# Altium PCB FotoKiteAdapter.PcbDoc
Units mil, origin at the board's own origin, x right, y up, seen from the top; angles counter-clockwise.
Board outline 2755.29 x 2755.91 mil, 4 copper layers (Top Layer, InternalPlane1, Mid-Layer 2, Bottom Layer); 97 components, 46 nets, 297 pads, 92 vias.
Unrouted connection lines stored in the file: 100.
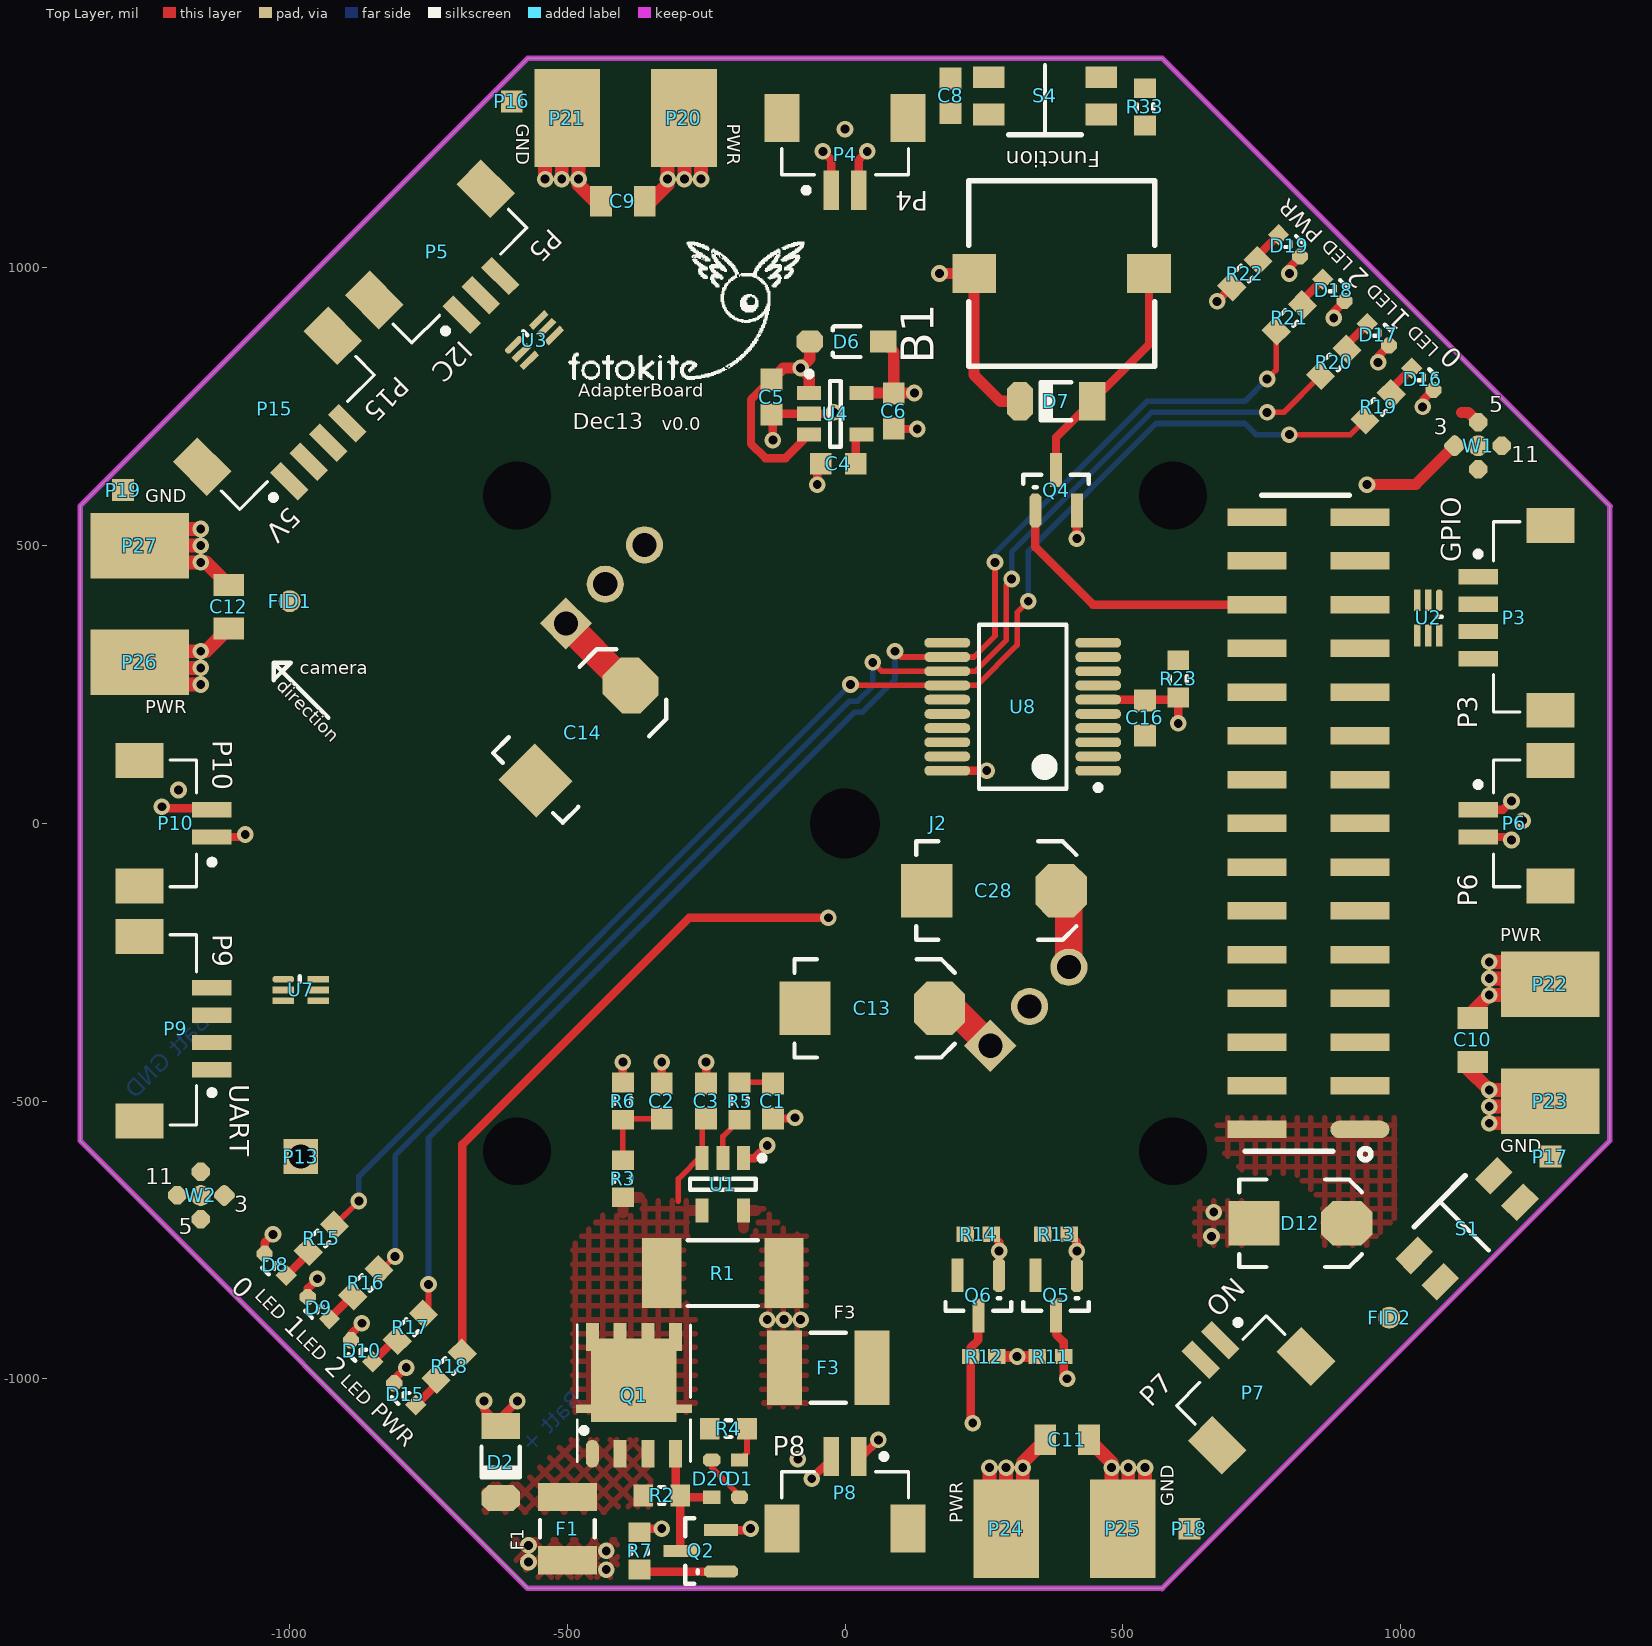
[diagram p0: Top Layer view]
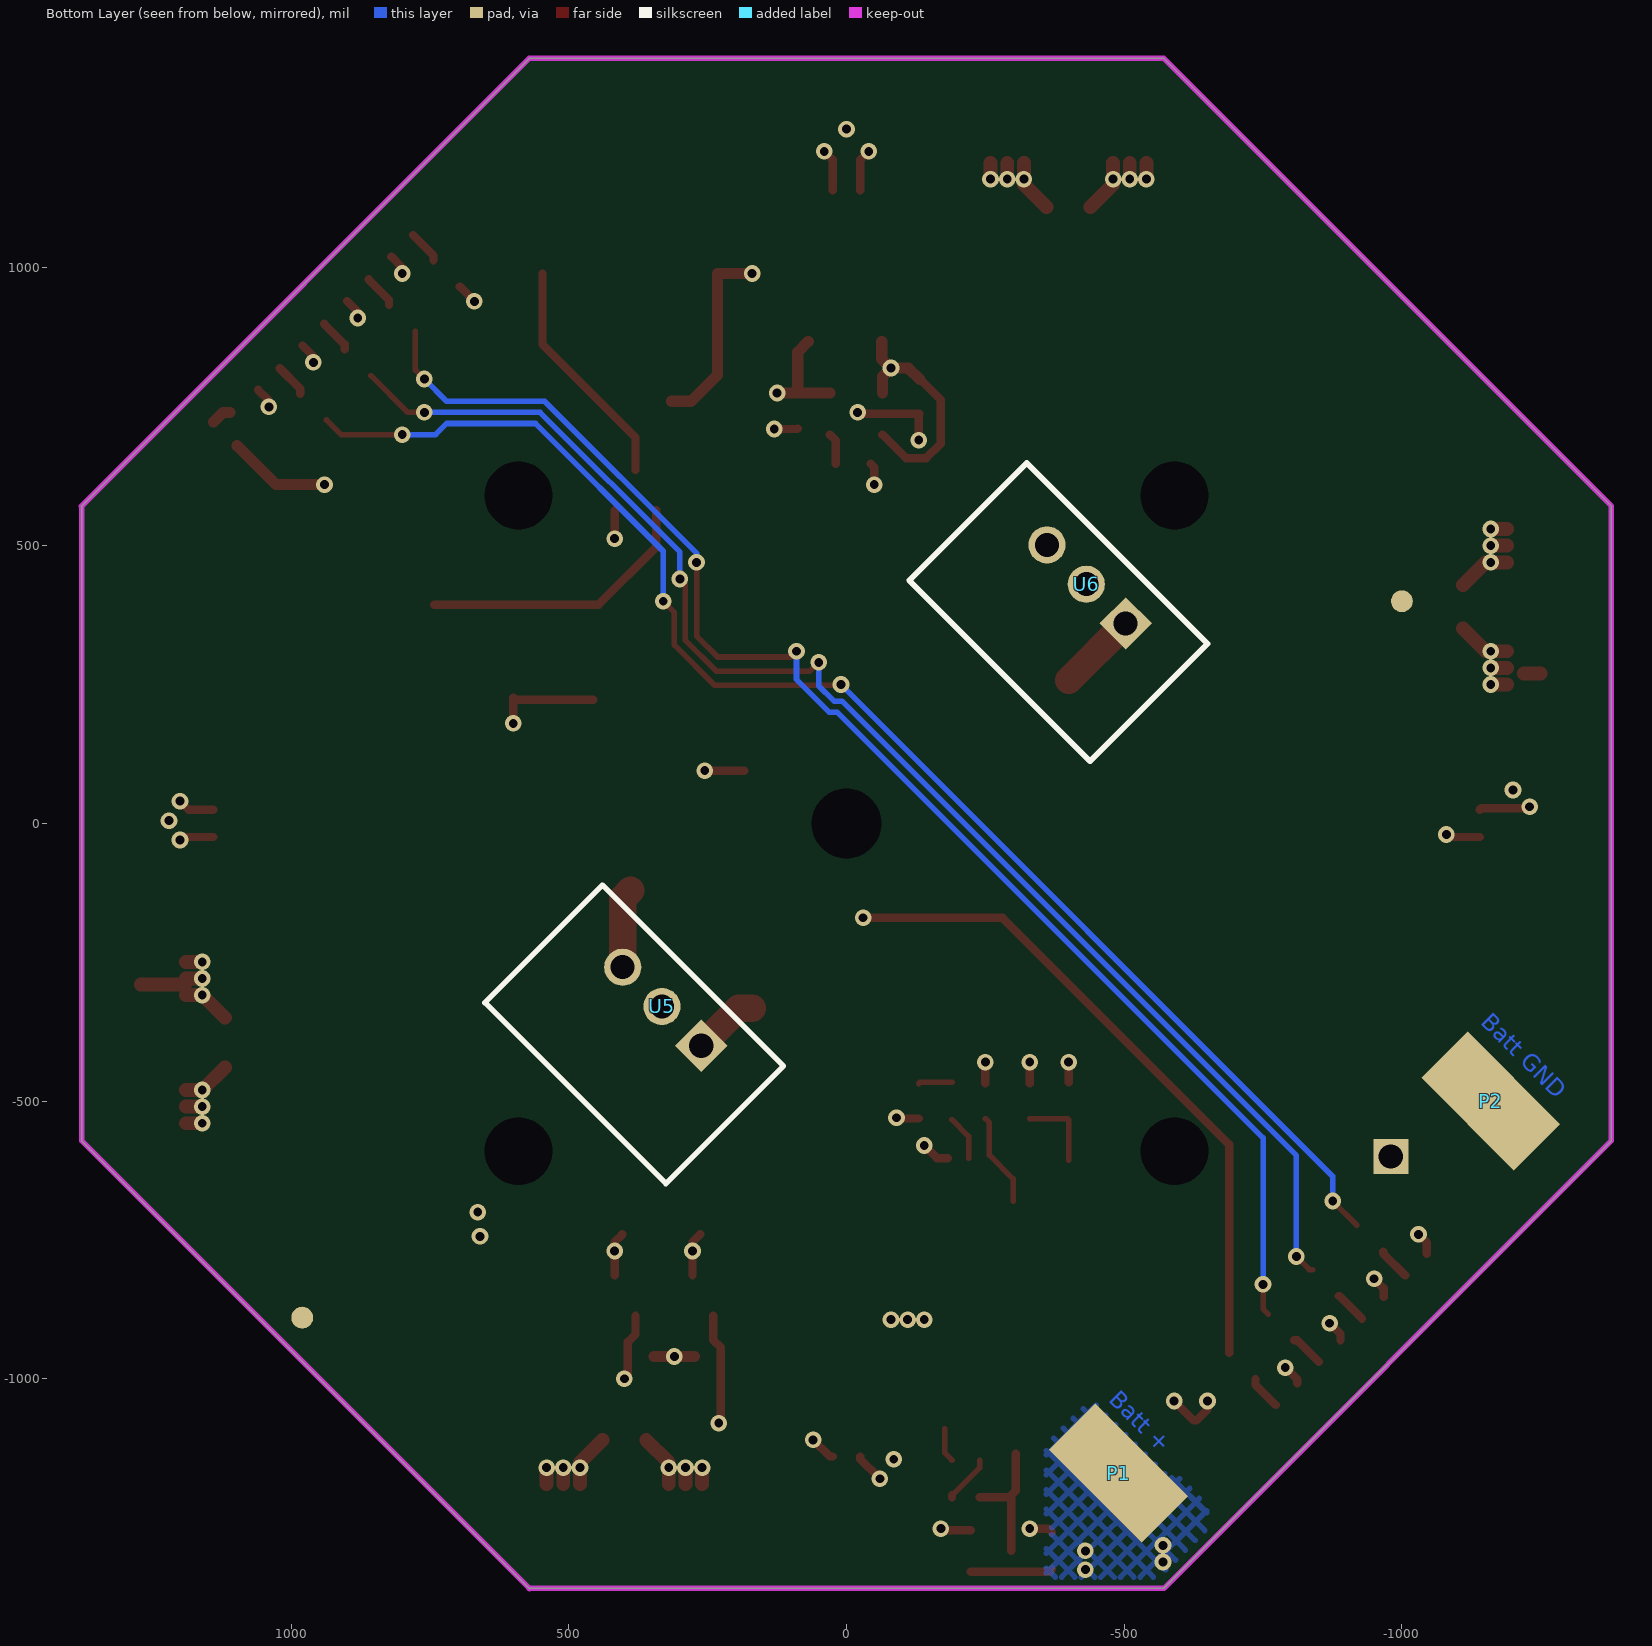
[diagram p1: Bottom Layer view, seen from below]
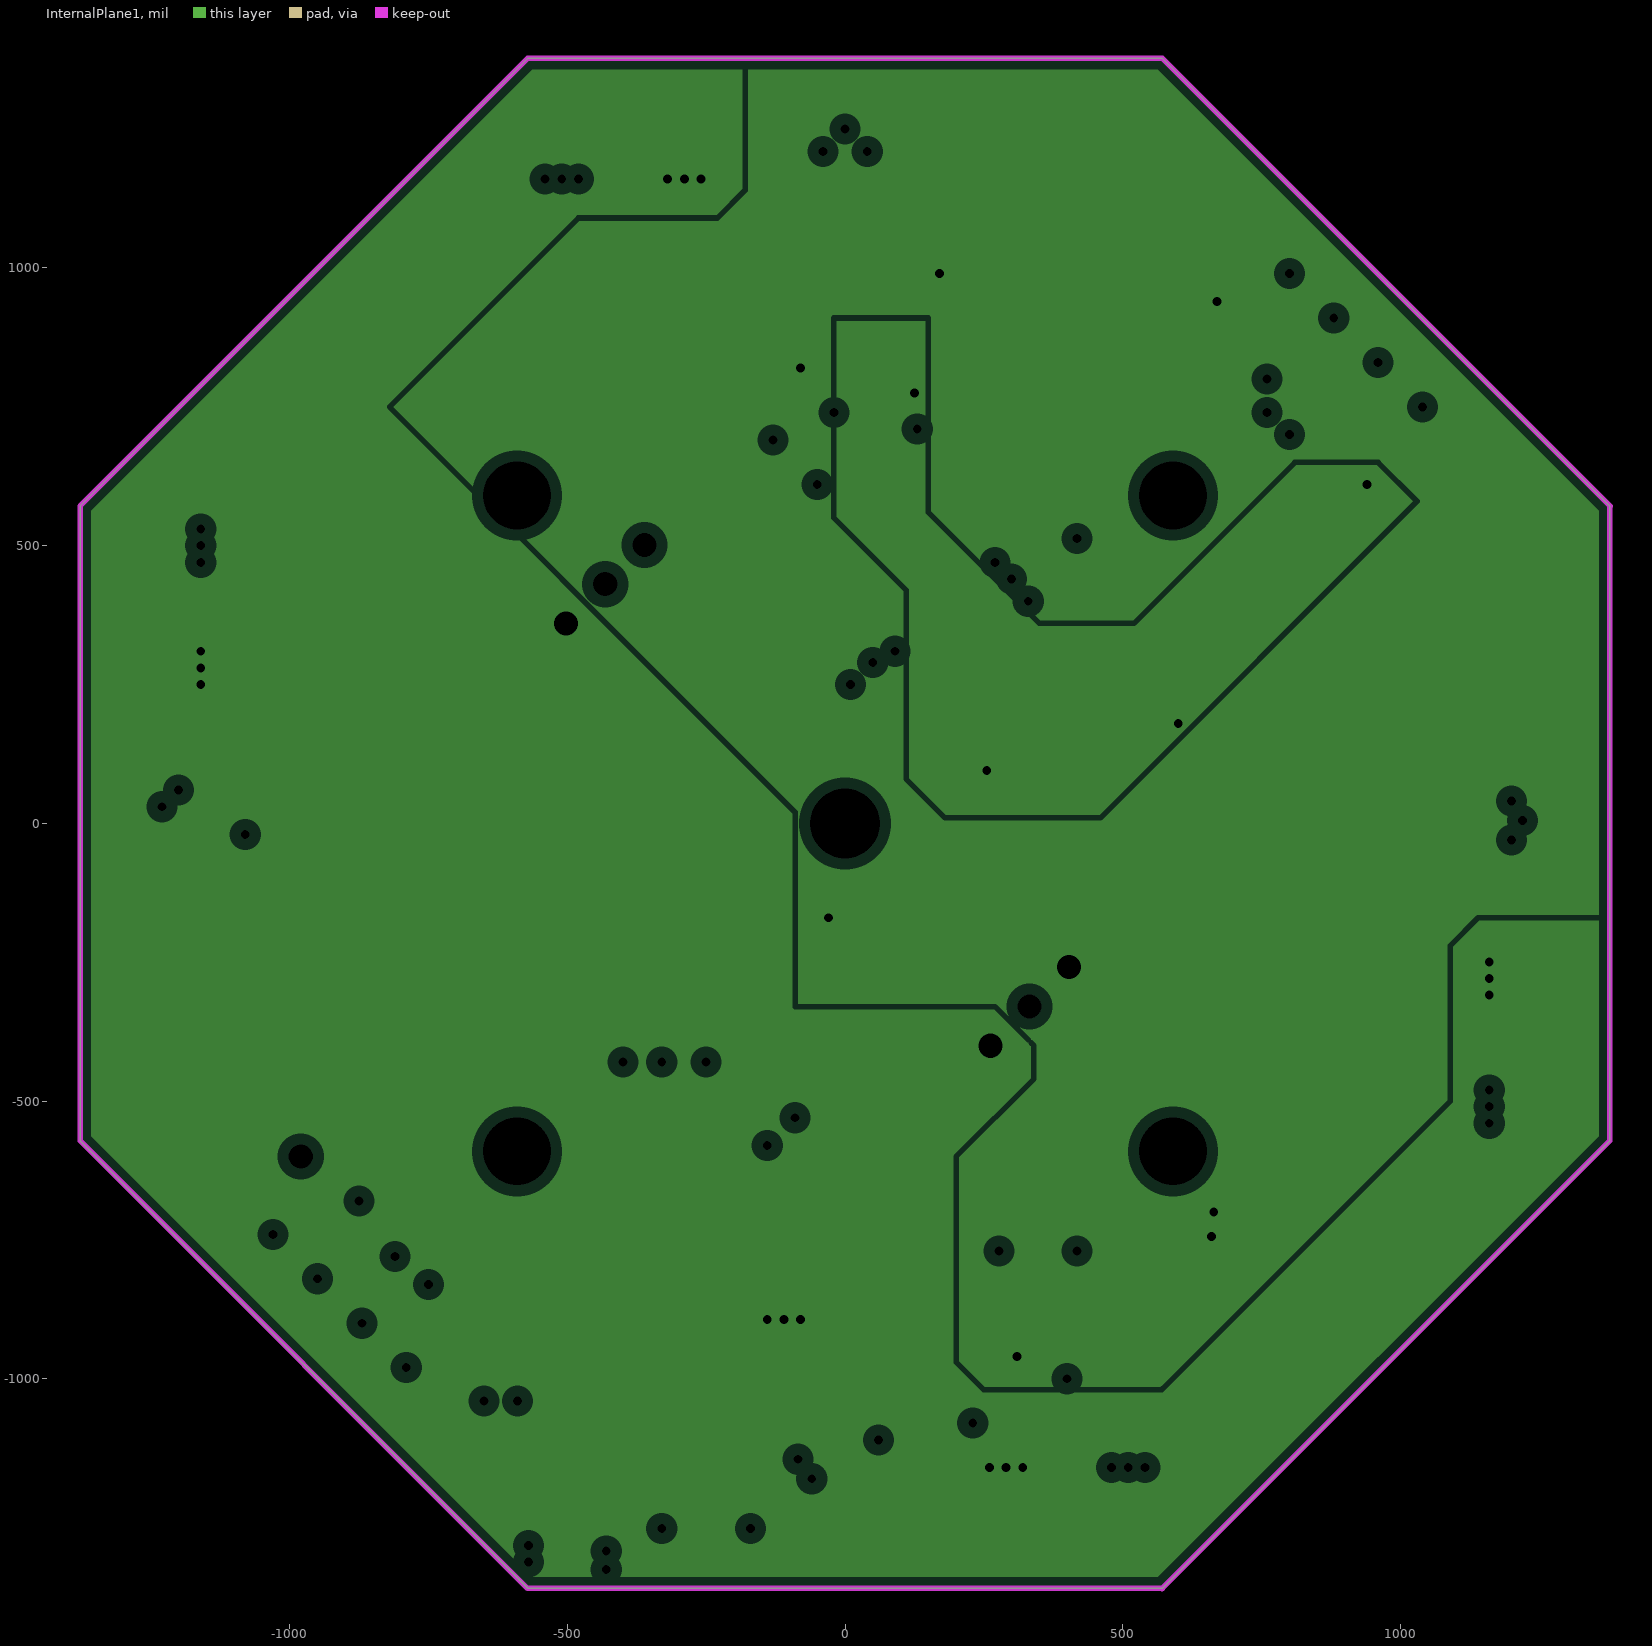
[diagram p2: InternalPlane1, clearances drawn from the general rule]
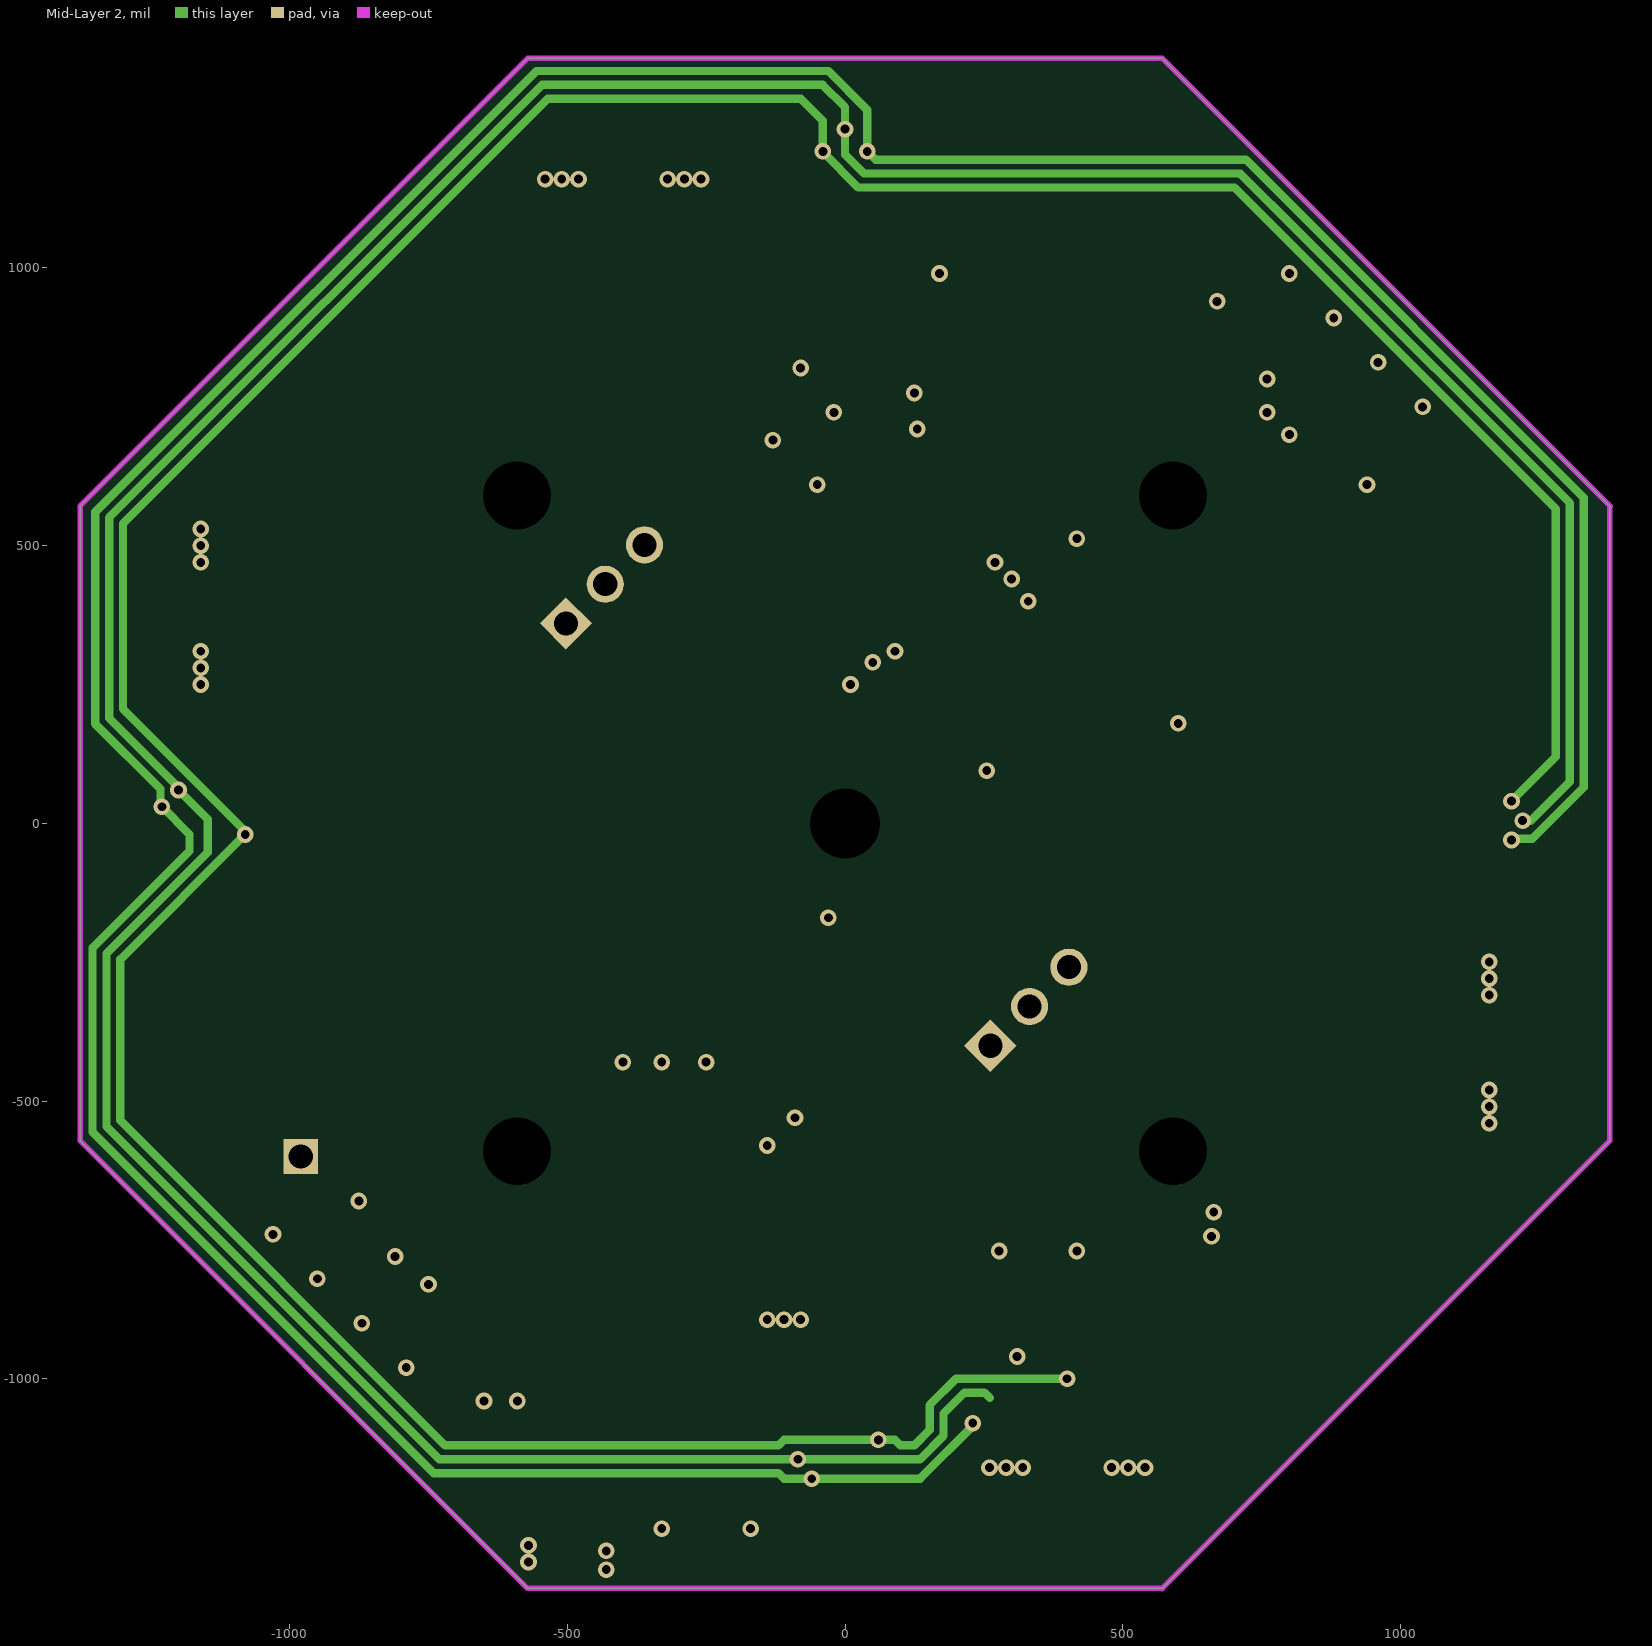
[diagram p3: Mid-Layer 2]

## Layer stack, top to bottom
Top Layer: signal copper 1.4
Dielectric: core 12.6, FR-4, Dk 4.8
InternalPlane1: plane copper 1.4, net D5V
Dielectric: prepreg 12.6, FR-4, Dk 4.8
Mid-Layer 2: signal copper 1.4
Dielectric: core 12.6, FR-4, Dk 4.8
Bottom Layer: signal copper 1.4

## Board outline
-1377.34,-571.38 -1377.34,571.38 -570.77,1377.95 -571.38,1377.34 571.38,1377.34 1377.95,570.77 1377.34,571.38 1377.34,-571.38 570.77,-1377.95 571.38,-1377.34 -571.38,-1377.34

## Design rules (kind name [scope] priority, off if disabled: settings)
Clearance "fine pitch clearance" [HasFootprint('SSOP16') OR   HasFootprint('DF17(3.0)-20DS-0.5V(57)-RECEPTABLE') OR HasFootprint('SOT-666-N') OR HasFootprint('LQFP100 50P1600X1600X160-N') OR HasFootprint('SSOP-SS20_N')  OR HasFootprint('TSSOP10_L') and not InNetClass('POWER')] p1: gap=5
Clearance "std clearance" [All] p2: gap=10 // normal signals
FabricationTestPointUsage TestPointUsage [All] p1: valid=0 allowmultiple=FALSE
FabricationTestpoint Testpoint [All] p1: side=3 testpointundercomponent=TRUE minsize=40 maxsize=100 preferedsize=60 minholesize=0 maxholesize=40 preferedholesize=32 testpointgrid=1 allowsidetop=TRUE allowsidebottom=TRUE usegrid=TRUE gridtolerance=0.01
HoleSize [All] p1: absolutevalues=TRUE maxlimit=393.7 minlimit=11.81 maxpercent=80.000 minpercent=20.000
MinimumSolderMaskSliver [All] p1: minsoldermaskwidth=1.8
PlaneClearance [All] p1: clearance=20
PlaneConnect [All] p1: planeconnectstyle=Relief reliefexpansion=20 reliefentries=4 reliefconductorwidth=10 reliefairgap=10
PolygonConnect PolygonConnect_1 [InNetClass('POWER')AND isvia] p1: connectstyle=Direct reliefconductorwidth=10 reliefentries=4 polygonreliefangle="90 Angle" airgapwidth=10
PolygonConnect PolygonConnect_3 [InNetClass('POWER')and InPadClass('POWER')] p2: connectstyle=Direct reliefconductorwidth=20 reliefentries=4 polygonreliefangle="90 Angle" airgapwidth=10
PolygonConnect PolygonConnect_2 [InNetClass('POWER') and PadXSize_AllLayers > 15] p3: connectstyle=Relief reliefconductorwidth=20 reliefentries=4 polygonreliefangle="90 Angle" airgapwidth=10
PolygonConnect [All] p4: connectstyle=Relief reliefconductorwidth=10 reliefentries=4 polygonreliefangle="90 Angle" airgapwidth=10
RoutingTopology "power supply" [InNetClass('Power')] p1: topology=Starburst
RoutingTopology "std signal lines" [All] p2: topology=Shortest
RoutingVias [All] p1: holewidth=15.75 width=31.5 viastyle="Through Hole" minholewidth=15.75 minwidth=31.5 maxholewidth=15.75 maxwidth=31.5
SMDNeckDown finepitch [hasFootprint('TSSOP10_L')] p1: percent=120.000
SMDNeckDown [All] p2: percent=100.000
SilkToSilkClearance SilkToSilkClearance_1 [HasFootprint('3 axis racceleration')] p1: silktosilkclearance=0
SilkToSilkClearance [All] p2: silktosilkclearance=5
SilkToSolderMaskClearance SilkscreenOverComponentPads [IsPad] p1: minsilkscreentomaskgap=5 clearancetoexposedcopper=TRUE
SolderMaskExpansion [All] p1: expansion=4
Width "Schematic Width Constraint" [InNet('SWBATT')] p1: maxlimit=200 minlimit=10 preferedwidth=25 midlayer2_minwidth=180 midlayer2_maxwidth=180 midlayer2_prefwidth=10 minimp=50.000000 maximp=50.000000 favimp=50.000000
Width "pwr lines" [InNetClass('Power')] p2: maxlimit=100 minlimit=8 preferedwidth=15
Width "signal lines Width" [All] p3: maxlimit=25 minlimit=8 preferedwidth=10 // std lines for low current signals
19 further rules are at their usual default settings.

## Classes and differential pairs
component class Connector: C11 C12 FID1 FID2 P1 P2 P3 P4 P5 P6 P8 P9 P10 P16 P17 P18 P19 P20 P21 P22 P23 P24 P25 P26 P27 Q5 Q6 R11 R12 R13 R14 U2 U3 U7 W1 W2
component class Power: C1 C2 C3 C4 C5 C6 C13 C14 C28 D1 D2 D6 D20 F1 F3 P7 P13 P15 Q1 Q2 R1 R2 R3 R4 R5 R6 R7 S1 U1 U4 U5 U6
net class Power: BAT D3V3 D5V D11V2 DGND NetD2_2 NetD12_2 SWBATT V_BATT_SUPPLY
component class uC: B1 C8 C16 D7 D8 D9 D10 D12 D15 D16 D17 D18 D19 J2 Q4 R15 R16 R17 R18 R19 R20 R21 R22 R23 R33 S4 U8
pad class POWER: C28-1 D2-2 D12-1 D12-2 F1-1 F1-2 F3-1 F3-2 J2-1 J2-2 P1-1 P2-1 Q1-0 Q1-1 Q1-2 Q1-3 Q1-4 Q1-5 Q1-6 Q1-7 Q1-8 R1-1 R1-2 R2-2

## Components (designator, comment, footprint, x,y, rotation, side; value= is the part's Value field where it differs from the comment)
B1 "Buzzer" Buzzer_SMT-0827-SW-3V-R 390,990 r90 top
C1 "100nF" "CAP_0603i_1608m -N" -130,-500 r90 top
C2 "100nF" "CAP_0603i_1608m -N" -330,-500 r270 top
C3 "100nF" "CAP_0603i_1608m -N" -250,-500 r270 top
C4 "10nF" "CAP_0603i_1608m -N" -12.24,647.4 r0 top
C5 "2u2F" "CAP_0603i_1608m -N" -132.24,767.4 r90 top
C6 "2u2F" "CAP_0603i_1608m -N" 87.76,742.4 r90 top
C8 "100nF" "CAP_0603i_1608m -N" 190,1310 r270 top
C9 "10uF" "CAP_0805i_2012m -N" -400,1120 r0 top
C10 "10uF" "CAP_0805i_2012m -N" 1130,-390 r90 top
C11 "10uF" "CAP_0805i_2012m -N" 400,-1110 r180 top
C12 "10uF" "CAP_0805i_2012m -N" -1110,390 r270 top
C13 "22uF" "EIA-7343-31 case D -N" 49,-333 r180 top
C14 "22uF" "EIA-7343-31 case D -N" -472,163 r225 top
C16 "100nF" "CAP_0603i_1608m -N" 540,190 r270 top
C28 "100uF" "EIA-7343-31 case D -N" 268,-121 r180 top
D1 "CDSU4148" SOD523F -190,-1180 r90 top
D2 "SMA6J20A" "Mini MELF - SOD-80 -N" -620,-1150 r90 top
D6 "MBR0540T1G" SOD123 2.76,867.4 r0 top
D7 "Diode" "Mini MELF - SOD-80 -N" 380,760 r0 top
D8 "Diode LED green" LED_LTST_SIDE -1025.56,-794.44 r315 top (schematic designator D1)
D9 "Diode LED red" LED_LTST_SIDE -947.78,-872.22 r315 top (schematic designator D2)
D10 "Diode LED yellow" LED_LTST_SIDE -870,-950 r315 top (schematic designator D3)
D12 "B230" "Diode SMB DO-214aa -N" 820,-720 r180 top
D15 "Diode LED green" LED_LTST_SIDE -792.22,-1027.78 r315 top (schematic designator D4)
D16 "Diode LED green" LED_LTST_SIDE 1040,800 r135 top (schematic designator D7)
D17 "Diode LED red" LED_LTST_SIDE 960,880 r135 top (schematic designator D8)
D18 "Diode LED yellow" LED_LTST_SIDE 880,960 r135 top (schematic designator D9)
D19 "Diode LED green" LED_LTST_SIDE 800,1040 r135 top (schematic designator D10)
D20 "CDSU4148" SOD523F -240,-1180 r270 top
F1 "3413.0331.22" "Fuse_1210i_3225m -N" -500,-1270 r90 top (schematic designator F7)
F3 "1812L150/24MR" "Fuse_1812i_4532m -N" -30,-980 r0 top (schematic designator F2)
FID1 "Fiducial" "Fiducial 2 sides" -1000,400 r90 top
FID2 "Fiducial" "Fiducial 2 sides" 980,-890 r90 top
J2 "PX4FMU_v1.7_Expansion Con" PX4FMU_v1.7_module_sicket 1003.94,-708.66 r180 top locked
P1 "Batt+" Pad_3x6mm -490,-1170 r135 bottom
P2 "Batt-" Pad_3x6mm -1160,-500 r135 bottom
P3 "DF13-4Pin" Hirose_DF13_SMT_RA_N4 1270,370 r270 top
P4 "ESC1" Hirose_DF13_SMT_RA_N2 0,1270 r0 top
P5 "DF13-3Pin" Hirose_DF13_SMT_RA_N3 -730,1060 r45 top
P6 "ESC2" Hirose_DF13_SMT_RA_N2 1270,0 r270 top
P7 "DF13-2Pin" Hirose_DF13_SMT_RA_N2 750,-1040 r225 top
P8 "ESC3" Hirose_DF13_SMT_RA_N2 0,-1270 r180 top (schematic designator P4)
P9 "DF13-4Pin" Hirose_DF13_SMT_RA_N4 -1270,-370 r90 top (schematic designator P3)
P10 "ESC4" Hirose_DF13_SMT_RA_N2 -1270,0 r90 top (schematic designator P4)
P13 "GND" PIN1 -980,-570 r0 top
P15 "DF13-4Pin" Hirose_DF13_SMT_RA_N4 -1040,760 r45 top
P16 "I2C GND" Pad_0603 -600,1300 r90 top
P17 "I2C GND" Pad_0603 1270,-600 r90 top
P18 "I2C GND" Pad_0603 620,-1270 r90 top
P19 "I2C GND" Pad_0603 -1300,600 r90 top
P20 "Motor 1+" Pad_3x4.5mm -290,1270 r0 top
P21 "Motor 1-" Pad_3x4.5mm -500,1270 r0 top
P22 "Motor 2+" Pad_3x4.5mm 1270,-290 r90 top
P23 "Motor 2-" Pad_3x4.5mm 1270,-500 r90 top
P24 "Motor 3+" Pad_3x4.5mm 290,-1270 r180 top
P25 "Motor 3-" Pad_3x4.5mm 500,-1270 r180 top
P26 "Motor 4+" Pad_3x4.5mm -1270,290 r90 top
P27 "Motor 4-" Pad_3x4.5mm -1270,500 r90 top
Q1 "SI7635DP-T1-GE3" "PowerPak SO-8" -380,-1030 r90 top
Q2 "BSS138" SOT23-N -260,-1310 r180 top
Q4 "BSS138" SOT23-N 380,600 r90 top
Q5 "BSN20" SOT23-N 380,-850 r270 top
Q6 "BSN20" SOT23-N 240,-850 r270 top
R1 "1m" "RES_2512i_6332m -N" -220,-810 r0 top
R2 "100k" "RES_0603i_1608m -N" -330,-1210 r180 top
R3 "360k" "RES_0603i_1608m -N" -400,-640 r270 top
R4 "100" "RES_0603i_1608m -N" -210,-1090 r180 top
R5 "100k" "RES_0603i_1608m -N" -190,-500 r90 top
R6 "100k" "RES_0603i_1608m -N" -400,-500 r270 top
R7 "10k" "RES_0603i_1608m -N" -370,-1310 r270 top
R11 "Res" "RES_0402i_1005m -N" 370,-960 r180 top
R12 "Res" "RES_0402i_1005m -N" 250,-960 r0 top
R13 "Res" "RES_0402i_1005m -N" 380,-740 r0 top
R14 "Res" "RES_0402i_1005m -N" 240,-740 r0 top
R15 "2k7" "RES_0603i_1608m -N" -942.73,-747.27 r45 top (schematic designator R2)
R16 "1k2" "RES_0603i_1608m -N" -862.73,-827.27 r45 top (schematic designator R3)
R17 "680R" "RES_0603i_1608m -N" -782.73,-907.27 r45 top (schematic designator R4)
R18 "1k" "RES_0603i_1608m -N" -712.73,-977.27 r45 top (schematic designator R5)
R19 "2k7" "RES_0603i_1608m -N" 960,750 r225 top (schematic designator R6)
R20 "1k2" "RES_0603i_1608m -N" 880,830 r225 top (schematic designator R7)
R21 "680R" "RES_0603i_1608m -N" 800,910 r225 top (schematic designator R8)
R22 "1k" "RES_0603i_1608m -N" 720,990 r225 top (schematic designator R9)
R23 "10k" "RES_0603i_1608m -N" 600,260 r270 top
R33 "10k" "RES_0603i_1608m -N" 540,1290 r270 top
S1 "EVQ-PUB02K" EVQPU 1120,-730 r45 top
S4 "EVQ-PUB02K" EVQPU 360,1310 r180 top
U1 "MAX4372FEUK+T" MAXM-U5+1_N -220,-650 r270 top
U2 "PESD3V3L5UV" SOT-666-N 1050,370 r270 top (schematic designator U?)
U3 "PESD3V3L5UV" SOT-666-N -560,870 r45 top
U4 "LP2985IM5X-3.3" MF05A_N -17.24,737.4 r0 top
U5 "TSR-1-2450" TST-1 403,-259 r225 bottom locked
U6 "TSR-1-2450" TST-1 -361.06,501.34 r225 bottom locked (schematic designator U5)
U7 "PESD3V3L5UV" SOT-666-N -980,-300 r0 top (schematic designator U2)
U8 "MCP23008-E/SS" SSOP-SS20_N 320,210 r180 top
W1 "Jumper 5pin" "J5_solder xstyle" 1140,680 r45 top
W2 "Jumper 5pin" "J5_solder xstyle" -1160,-670 r225 top (schematic designator W1)

## Footprints (in the part's own frame and the unit in brackets; to place one, negate y for a bottom-side part, rotate by r counter-clockwise, add the part's x,y. Pads: shape width x height; smd on the part's side, far side on the other; paste and mask are expansions set on the pad)
Buzzer_SMT-0827-SW-3V-R [mm]
  rect 1.8x2 smd: 1(0,4) 2(0,-4)
  silkscreen extent -4.25,-4.25 4.25,4.25, body extent -4.32,-4.32 4.32,4.32, height 5
"CAP_0603i_1608m -N" [mm] "Chip Capacitor, Body 1.6x0.8mm, IPC Medium Density"
  rect 1x1 smd: 1(-0.8,0) 2(0.8,0)
  body extent -0.8,-0.4 0.8,0.4, height 0.8
"CAP_0805i_2012m -N" [mm] "Chip Capacitor, Body 2.0x1.3mm, IPC Medium Density"
  rect 1x1.4 smd: 1(-1,0) 2(1,0)
  body extent -1,-0.62 1,0.63, height 0.6
"Diode SMB DO-214aa -N" [mm] "Diode Case  4.4x3.5mm, IPC Medium Density"
  rect 2.35x2.05 smd: 1(2.125,0)
  oct 2.35x2.05 smd: 2(-2.125,0)
  silkscreen extent -2.8,-2 2.8,2, body extent -2.7,-1.8 2.7,1.8, height 2.5
"EIA-7343-31 case D -N" [mm] "Molded Diode, 2-Leads, Body 7.3x4.3mm, IPC Medium Density"
  oct 2.35x2.45 smd: 1(-3.075,0)
  rect 2.35x2.45 smd: 2(3.075,0)
  silkscreen extent -3.77,-2.25 3.56,2.25, body extent -4.5,-2.32 4.5,2.29
EVQPU [mm] "Panasonic SMT Tact Switch"
  rect 1.45x1 smd: 1(-2.575,0.85) 1(2.575,0.85) 2(-2.575,-0.85) 2(2.575,-0.85)
  silkscreen extent -1.65,-1.4 1.65,1.78, body extent -2.35,-2.66 2.35,1.71, height 1.65
"Fiducial 2 sides" [mm] "Fiducial marks"
  round 1 smd mask+0.5: 0(0,0)
  round 1 smd far side mask+0.5: 0(0,0)
"Fuse_1210i_3225m -N" [mm] "Chip Fuse Body 3.2x2.5mm, IPC Medium Density"
  rect 1.3x2.7 smd: 1(-1.45,0) 2(1.45,0)
  silkscreen extent -0.4,-1.25 0.4,1.25, body extent -1.61,-1.29 1.61,1.29, height 0.67
"Fuse_1812i_4532m -N" [mm] "Chip Fuse Body 4.5x3.2mm, IPC Medium Density"
  rect 1.6x3.4 smd: 1(-2,0) 2(2,0)
  silkscreen extent -0.8,-1.6 0.8,1.6, body extent -2.36,-1.7 2.37,1.71, height 1.34
Hirose_DF13_SMT_RA_N2 [mm] "Hirose DF13-series SMT right-angle connector, 2 pin"
  rect 0.7x1.8 smd: 1(-0.625,-3.3) 2(0.625,-3.3)
  rect 1.6x2.2 smd: ""(-2.875,0) ""(2.875,0)
  silkscreen extent -2.9,-3.43 2.9,-1.4, body extent -2.08,-2.4 2.07,2.5, height 3.6
Hirose_DF13_SMT_RA_N3 [mm] "Hirose DF13-series SMT right-angle connector, 3 pin"
  rect 0.7x1.8 smd: 1(-1.875,-3.3) 2(-0.625,-3.3) 3(0.625,-3.3)
  rect 1.6x2.2 smd: ""(-4.225,0) ""(2.975,0)
  silkscreen extent -4.4,-3.43 3.05,-1.4, body extent -4.38,-2.6 3,2.3, height 3.6
Hirose_DF13_SMT_RA_N4 [mm] "Hirose DF13-series SMT right-angle connector, 4 pin"
  rect 0.7x1.8 smd: 1(-1.875,-3.3) 2(-0.625,-3.3) 3(0.625,-3.3) 4(1.875,-3.3)
  rect 1.6x2.2 smd: ""(-4.225,0) ""(4.225,0)
  silkscreen extent -4.4,-3.43 4.3,-1.4, body extent -4.38,-2.6 4.3,2.3, height 3.6
"J5_solder xstyle" [mm]
  rrect50% 0.8x0.8 smd: 1(-0.762,0.762)
  oct 0.8x0.8 smd: 2(-0.762,-0.762) 3(0.762,-0.762) 4(0.762,0.762)
  round 0.95 smd: 5(0,0)
  body extent -0.91,-0.15 0.15,0.91, height 0.3
LED_LTST_SIDE [mm]
  rect 0.7x0.7 smd: 1(0.7,0)
  oct 0.7x0.7 smd: 2(-0.7,0)
  silkscreen extent -0.33,-0.53 0.1,0.18, body extent -0.74,-0.81 0.85,0.34, height 0.6
MAXM-U5+1_N [mm] "SOT23, 5-Leads, Body 2.9x1.625mm, Pitch 0.95mm, IPC Medium Density"
  rect 1.1x0.6 smd: 1(-1.2,0.95) 2(-1.2,0) 3(-1.2,-0.95) 4(1.2,-0.95) 5(1.2,0.95)
  silkscreen extent -1.32,-1.5 0.25,1.93, body extent -0.87,-1.5 0.87,1.5, height 1.45
MF05A_N [mm] "SOT23, 5-Leads, Body 2.9x1.6mm, Pitch 0.95mm, Lead Span 2.8mm, IPC Medium Density"
  rect 1.1x0.65 smd: 1(-1.2,0.95) 2(-1.2,0) 3(-1.2,-0.95) 4(1.2,-0.95) 5(1.2,0.95)
  silkscreen extent -1.32,-1.5 0.25,1.95, body extent -0.83,-1.49 0.83,1.5, height 1.19
"Mini MELF - SOD-80 -N" [mm] "MELF Diode, 2-Leads, Body 3.5x1.5mm, IPC Medium Density"
  rect 1.2x1.75 smd: 1(1.65,0)
  oct 1.2x1.75 smd: 2(-1.65,0)
  silkscreen extent -0.7,-0.88 0.7,0.87, body extent -1.75,-0.75 1.75,0.75, height 1.55
Pad_3x4.5mm [mm]
  rect 3x4.5 smd: 1(0,0)
Pad_3x6mm [mm]
  rect 3x6 smd: 1(0,0)
Pad_0603 [mm]
  rect 1x1 smd: 1(0,0)
PIN1 [mm] "Connector; Plug"
  rect 1.6x1.6 hole 1.1: 1(0,-0.762)
"PowerPak SO-8" [mm] "for    SI7635DP-T1-GE3"
  rect 0.4x5.3 smd: 0(-0.61,0)
  rect 3.81x3.91 smd: 0(0.69,0)
  oval 1.27x0.6 smd: 1(-2.67,1.905)
  rect 1.27x0.6 smd: 2(-2.67,0.635) 3(-2.67,-0.635) 4(-2.67,-1.905) 5(2.67,-1.905) 6(2.67,-0.635) 7(2.67,0.635) 8(2.67,1.905)
  silkscreen extent -3.02,-2.59 3.23,2.59, body extent -3.02,-2.6 3.22,2.65, height 1.19
PX4FMU_v1.7_module_sicket [mm] "socket to plug the PX4FMU into"
  round 1.524 hole 3.1: 0(10.5,-3) 0(10.5,-33) 0(40.5,-3) 0(40.5,-33)
  oval 2.7x0.8 smd: 1(1.95,-4)
  rect 2.7x0.8 smd: 2(6.65,-4) 3(1.95,-6) 4(6.65,-6) 5(1.95,-8) 6(6.65,-8) 7(1.95,-10) 8(6.65,-10) 9(1.95,-12) 10(6.65,-12) 11(1.95,-14) 12(6.65,-14) 13(1.95,-16) 14(6.65,-16) 15(1.95,-18) 16(6.65,-18) 17(1.95,-20) 18(6.65,-20) 19(1.95,-22) 20(6.65,-22) 21(1.95,-24) 22(6.65,-24) 23(1.95,-26) 24(6.65,-26) 25(1.95,-28) 26(6.65,-28) 27(1.95,-30) 28(6.65,-30) 29(1.95,-32) 30(6.65,-32)
  silkscreen extent 1.45,-33 7.2,-2.62, body extent 1.3,-33.01 7.3,-3.01, height 6.6
"RES_0402i_1005m -N" [mm] "Chip Resistor, Body 1.1x0.5mm, IPC Medium Density"
  rect 0.8x0.7 smd: 1(-0.6,0) 2(0.6,0)
  body extent -0.5,-0.25 0.5,0.25, height 0.3
"RES_0603i_1608m -N" [mm] "Chip Resistor, Body 1.6x0.8mm, IPC Medium Density"
  rect 0.9x1 smd: 1(-0.85,0) 2(0.85,0)
  silkscreen extent -0.13,-0.38 0.13,0.38, body extent -0.8,-0.4 0.8,0.4, height 0.4
"RES_2512i_6332m -N" [mm] "Chip Resistor, Body 6.3x3.2mm, IPC Medium Density"
  rect 1.8x3.2 smd: 1(-2.8,0) 2(2.8,0)
  silkscreen extent -1.6,-1.5 1.6,1.5, body extent -3.3,-1.4 3.3,1.27, height 0.71
SOD123 [mm] "SOD123  2-Leads, Body, IPC Medium Density"
  rect 1.22x1 smd: 1(1.681,0)
  oct 1.22x1 smd: 2(-1.681,0)
  silkscreen extent -0.64,-0.7 0.64,0.7, body extent -1.85,-0.84 1.85,0.76, height 1.27
SOD523F [mm] "SOD523F  2-Leads, Body, IPC Medium Density"
  rect 0.6x0.8 smd: 1(0.85,0)
  oct 0.6x0.8 smd: 2(-0.85,0)
  body extent -0.9,-0.51 0.9,0.49, height 0.85
SOT23-N [mm] "SOT23, 3-Leads, Body 3.0x2.6mm (max), Pitch 0.95mm, IPC Medium Density"
  oct 1.55x0.55 smd: 1(-0.925,0.95)
  rect 1.55x0.55 smd: 2(-0.925,-0.95) 3(0.925,0)
  silkscreen extent 0.13,-1.5 0.7,1.5, body extent -1.21,-1.45 1.21,1.45, height 0.98
SOT-666-N [mm] "SOT666, 6-Leads, Body 1.5x2.6mm (max), Pitch 0.50mm, IPC Medium Density"
  oct 0.99x0.3 smd: 1(-0.805,0.5)
  rect 0.99x0.3 smd: 2(-0.805,0) 3(-0.805,-0.5) 4(0.805,-0.5) 5(0.805,0) 6(0.805,0.5)
  silkscreen extent -0.05,0.38 -0.05,0.64, body extent -0.88,-0.85 0.82,0.85, height 0.6
SSOP-SS20_N [mm] "SOP, 20-Leads, Body 7.2x5.2mm, Pitch 0.65mm, IPC Medium Density"
  oval 2.1x0.45 smd: 1(-3.45,2.925) 2(-3.45,2.275) 3(-3.45,1.625) 4(-3.45,0.975) 5(-3.45,0.325) 6(-3.45,-0.325) 7(-3.45,-0.975) 8(-3.45,-1.625) 9(-3.45,-2.275) 10(-3.45,-2.925) 11(3.45,-2.925) 12(3.45,-2.275) 13(3.45,-1.625) 14(3.45,-0.975) 15(3.45,-0.325) 16(3.45,0.325) 17(3.45,0.975) 18(3.45,1.625) 19(3.45,2.275) 20(3.45,2.925)
  silkscreen extent -3.57,-3.75 2,3.82, body extent -2.8,-3.75 2.8,3.75, height 2
TST-1 [mm] "Traco DCDC Converter"
  rect 1.7x1.7 hole 1.1: 1(5.08,0)
  round 1.7 hole 1.1: 2(2.54,0) 3(0,0)
  silkscreen extent -3.31,-5.6 8.39,2, body extent -3.34,-5.65 8.36,1.96, height 10.2

## Part data
B1: "Generic Buzzer"
C1 C2 C3 C4 C5 C6 C8 C9 C10 C11 C12 C16: library part Cap, "capacitor"
C13 C14 C28: library part "Cap pol", "Polarised capacitor (e.g. Electrolytic )"
D1 D20: library part Diode, "Default Diode"
D2: library part "Diode Zener", "Zener Diode"
D6 D12: library part "Diode  Schottky", "Schottky Diode"
D7: "Default Diode"
D8 D9 D10 D15 D16 D17 D18 D19: library part "Diode LED", "LED"
F1 F3: library part Fuse, "Fuse"
FID1 FID2: "Fiducial mark for automatic pcb population"
J2: library part "PX4FMU_v1.7_Expansion Con_1", "J2 / J3"
P1 P2 P13 P16 P17 P18 P19 P20 P21 P22 P23 P24 P25 P26 P27: library part Pad, "Single Pad or Testpoint"
P3 P5 P9 P15: "Hirose_DF13_SMT_RA_N4"
P4 P6 P8 P10: library part DF13-2Pin, "Hirose_DF13_SMT_RA_N2"
P7: "Hirose_DF13_SMT_RA_N2"
Q1: library part MOSFET-P-Power_2, "Power P-Channel MOSFET + pad"
Q2 Q4: library part MOSFET-N2, "N-Channel MOSFET"
Q5 Q6: library part MOSFET-N, "N-Channel MOSFET"
R1 R2 R3 R4 R5 R6 R7 R15 R16 R17 R18 R19 R20 R21 R22 R23 R33: library part Res, "Resistor"
R11 R12 R13 R14: "Resistor"
S1 S4: library part "SW PB", "Switch"
U1: library part CMP-0252-00304-1, "Micropower, Voltage-Output, High-Side, Current-Sense Amplifier, 50 V / V Gain, -40 to 85 degC, 5-Pin SOT23 (U5+1), Pb-Free, Tape and Reel"
U2 U3 U7: library part PESDx, "ESD-protection diode array, 5ch"
U4: library part CMP-0062-01952-2, "Micropower 150 mA Low-Noise Ultra Low-Dropout Regulator, 5-pin SOT-23"
U5 U6: library part TSR-1-24xx, "DC/DC Converter; different Voltages; 1A; Traco"
U8: library part CMP-0186-00169-3, "8-Bit I/O Expander with Serial Interface, 20-Pin SSOP, Extended Temperature"
W1 W2: "Jumper 5-pin style"

## Free pads (board coordinates)
  rect 11.81x31.5 hole 125.98: 0(0,0)

## Via types
v1: diameter 30, hole 16, Top Layer to Bottom Layer, tented both sides, 92 vias

## Nets (pads, with @x,y where several pads share a name; then routed paths per layer and width w, separated by ;. In a path a pad name is that pad's centre, name@x,y a point inside that pad or via, vN(x,y) a via of type N, cw(c..) or ccw(c..) an arc to the next point about the centre after c; other vN are vias at no path point)
BAT: F1.1 P1.1
  other v1: -430,-1343.66 -570,-1330 -430,-1310 -570,-1300
D3V3: C6.2 C16.1 D6.1 Q5.1 Q6.1 R13.2 R14.2 R23.2 R33.2 U4.5 U8.6 U8.20 W1.1 W2.1 | length 810.4
  Top Layer w15: U8.20 v1(255.16,94.84) v1@260,90 ; R14.2 277.4,-753.78 v1(277.4,-770) Q6.1 ; R13.2 417.4,-753.78 v1(417.4,-770) Q5.1 ; U8.6 596.26,222.8 R23.2 v1(600,180)
  Top Layer w20: U4.5 C6.2@87.76,774.8 ; D6.1 87.76,848.59 C6.2@87.76,774.8 ; v1(124.8,774.8) C6.2@87.76,774.8 ; v1(940,610) 1027.57,610 W1.1
D5V: B1.1 C5.2 C28.1 D6.2 D7.2 D12.1 R11.2 R12.2 R18.2 R22.2 U4.1 U4.3 U5.3 W1.4 W2.4 | length 2273.6
  Top Layer w15: R18.2 -689.07,-578.02 -281.05,-170 v1(-30,-170) ; C5.2 -133.37,798.9 -169.43,762.84 -169.43,683.47 -143.46,657.5 -106.99,657.5 U4.3 ; v1(670,940) R22.2
  Top Layer w20: C5.2 -111.14,820 v1(-80,820) ; U4.1 -64.49,804.49 v1(-80,820) ; D6.2 -63.43,836.57 v1(-80,820) ; v1(170,990) B1.1 232.52,807.48 280,760 D7.2 ; R12.2 v1(310,-960) R11.2 ; 1110,740 1122.43,740 W1.4
  Top Layer w50: C28.1 403,-134.94 U5.3
  other v1: 660,-743.66 663.94,-700
D11V2: F3.2 W1.3 W2.3
DGND: C1.1 C2.1 C3.1 C4.1 C5.1 C6.1 C8.1 C9.1 C10.1 C11.1 C12.1 C13.2 C14.2 C16.2 C28.2 D2.1 D8.2 D9.2 D10.2 D15.2 D16.2 D17.2 D18.2 D19.2 J2.3 J2.4 J2.27 P2.1 P3.2 P5.3 P7.2 P9.2 P13.1 P15.3 P15.4 P16.1 P17.1 P18.1 P19.1 P21.1 P23.1 P25.1 P27.1 Q2.2 Q4.2 R6.1 R7.1 S1.2 S4.2 U1.1 U2.2 U3.2 U4.2 U5.2 U6.2 U7.2 U8.3 U8.4 U8.5 U8.9 | length 8703.4
  Top Layer w15: D8.2 -1045.05,-755.05 v1(-1030,-740) ; D9.2 -967.27,-837.27 v1(-950,-820) ; D10.2 -889.49,-919.49 v1(-870,-900) ; D15.2 -811.71,-1001.71 v1(-790,-980) ; v1(-650,-1040) -650,-1055.04 -630,-1075.04 -625.04,-1075.04 v1(-590,-1040) ; R6.1 v1(-400,-430) ; R7.1 -363.46,-1270 v1(-330,-1270) ; C2.1 v1(-330,-430) ; C3.1 v1(-250,-430) ; Q2.2 -172.6,-1272.6 v1(-170,-1270) ; U1.1 -162.76,-602.76 v1(-140,-580) ; C5.1@-130.75,737.4 U4.2 v1@-22.6,737.4 ; C1.1 -91.5,-531.5 v1(-90,-530) ; v1(-130,690) C5.1@-130,733.66 ; v1(-50,610) -50,641.14 C4.1 ; C6.1 88.66,710 v1(130,710) ; Q4.2 v1(417.4,512.6) v1@420,510 ; v1(800,990) 800,1001.03 D19.2 ; v1(880,910) 880,921.03 D18.2 ; v1(960,830) 960,841.03 D17.2 ; v1(1040,750) 1040,761.03 D16.2
  Top Layer w25: P27.1@-1189.37,470 v1(-1160,470) -1150.63,470 C12.1 ; P27.1@-1189.37,500 v1(-1160,500) ; P27.1@-1189.37,530 v1(-1160,530) ; v1(-540,1160) P21.1@-540,1189.37 ; v1(-510,1160) P21.1@-510,1189.37 ; P21.1@-480,1189.37 v1(-480,1160) -480,1150.63 C9.1@-439.37,1110 ; C11.1 480,-1150.63 v1(480,-1160) P25.1@480,-1189.37 ; P25.1@510,-1189.37 v1(510,-1160) ; P25.1@540,-1189.37 v1(540,-1160) ; C10.1@1119.37,-439.37 v1(1160,-480) P23.1@1189.37,-480 ; v1(1160,-540) P23.1@1189.37,-540 ; v1(1160,-510) P23.1@1189.37,-510
  Mid-Layer 2 w15: 260.69,-1034.73 250.96,-1025 215,-1025 177.32,-1062.68 177.32,-1102.68 135,-1145 v1(-85,-1145) -730.36,-1145 -765.36,-1110 -1329.84,-545.52 -1329.84,-234.48 -1147.68,-52.32 -1147.68,7.68 v1(-1200,60) -1200,64.64 -1325,189.64 -1325,550.36 -545.52,1329.84 -40.36,1329.84 0,1289.48 v1(0,1250) 0,1204.04 34.04,1170 711.54,1170 820.77,1060.77 1305,576.54 1305,75 1235,5 v1(1220,5)
  other v1: -20,740
GPIO1: P3.3 U2.6 U8.19
GPIO2: P3.4 U2.4 U8.18
GPIO_INT: J2.24 R23.1 U8.8
I2C2_SCL: J2.17 P5.1 U3.6 U8.1
I2C2_SDA: J2.18 P5.2 U3.4 U8.2
I2C3_SCL: J2.9 Q5.2 R13.1
I2C3_SCL_5V: P4.1 P6.1 P8.1 P10.1 Q5.3 R11.1 | length 7439.9
  Top Layer w15: P10.1 -1084.61,-24.61 v1(-1080,-20) ; v1(-40,1210) -24.61,1194.61 P4.1 ; P8.1 29.92,-1140.08 v1(60,-1110) ; Q5.3 380,-920 393.62,-933.62 R11.1 393.62,-993.62 v1(400,-1000) ; P6.1 1184.61,24.61 v1(1200,40)
  Mid-Layer 2 w15: v1@50,-1110 -110,-1110 -120,-1120 -720,-1120 -1304.84,-535.16 -1304.84,-244.84 v1(-1080,-20) -1080,-14.04 -1300,205.96 -1300,540 -535.16,1304.84 -80,1304.84 -40,1264.84 v1(-40,1210) -40,1208.68 23.68,1145 701.19,1145 1280,566.19 1280,120 v1(1200,40) ; v1(60,-1110) 90,-1110 100,-1120 124.64,-1120 152.32,-1092.32 152.32,-1047.68 200,-1000 v1@390,-1000
I2C3_SDA: J2.10 Q6.2 R14.1
I2C3_SDA_5V: P4.2 P6.2 P8.2 P10.2 Q6.3 R12.1 | length 7695.3
  Top Layer w15: v1(-1230,30) -1227.5,27.5 -1142.97,27.5 P10.2 ; v1(-60,-1180) -24.61,-1144.61 P8.2 ; P4.2 24.61,1194.61 v1(40,1210) ; v1(230,-1080) 226.38,-1076.38 R12.1 226.38,-943.62 240,-930 Q6.3 ; P6.2 1194.61,-24.61 v1(1200,-30)
  Mid-Layer 2 w15: v1(230,-1080) 230,-1085.36 135.36,-1180 v1(-60,-1180) -110,-1180 -120,-1170 -740.71,-1170 -760,-1150.71 -1354.84,-555.87 -1354.84,-224.13 -1180.36,-49.64 -1180.36,-19.64 v1(-1230,30) -1232.5,32.5 -1232.5,61.79 -1350,179.29 -1350,560.71 -555.87,1354.84 -30,1354.84 40,1284.84 v1(40,1210) 55,1195 721.9,1195 1330,586.9 1330,90 1330,64.64 1237.86,-27.5 1202.5,-27.5 v1(1200,-30)
I_BAT: C1.2 J2.29 R5.2 | length 60.8
  Top Layer w10: R5.2 -131.97,-466.54 C1.2
LED0: R15.2 R19.2 U8.14 | length 2587.2
  Top Layer w10: R15.2 v1(-875.46,-680) ; v1(10,250) 11.61,248.39 U8.14 237.26,248.39 310,321.12 310,380 v1(330,400) ; v1(800,700) 910,700 R19.2
  Bottom Layer w10: v1(-875.46,-680) -875.46,-635.46 v1(10,250) ; v1(330,400) 330,490 560,720 720,720 740,700 v1(800,700)
LED1: R16.2 R20.2 U8.13 | length 2594
  Top Layer w10: R16.2 -833.61,-803.61 v1(-810,-780) ; v1(50,290) 66.02,273.98 U8.13 234.57,273.98 290,329.41 290,430 v1(300,440) ; v1(760,740) 790,740 R20.2
  Bottom Layer w10: v1(-810,-780) -810,-598.28 8.28,220 22.43,220 50,247.57 v1(50,290) ; v1(300,440) 300,488.28 551.72,740 v1(760,740)
LED2: R17.2 R21.2 U8.12 | length 2615.5
  Top Layer w10: R17.2 -750,-874.54 v1(-750,-830) ; v1(90,310) 100.43,299.57 U8.12 231.87,299.57 270,337.69 v1(270,470) ; v1(760,800) 776.34,816.34 R21.2
  Bottom Layer w10: v1(-750,-830) -750,-566.57 16.57,200 30.71,200 90,259.29 v1(90,310) ; v1(270,470) 270,486.57 543.43,760 720,760 v1(760,800)
NetB1_2: B1.2 D7.1 Q4.3 | length 423
  Top Layer w15: Q4.3 380,695.04 D7.1 547.48,862.52 B1.2
NetC4_2: C4.2 U4.4 | length 57.1
  Top Layer w15: C4.2 19.25,689.25 U4.4
NetD1_1: D1.1 R4.1 | length 62.1
  Top Layer w10: D1.1 -176.54,-1133.07 R4.1
NetD1_2: D1.2 D20.2 P7.1 S1.1 | length 87.6
  Top Layer w10: D20.2 -240,-1160 D1.2@-190,-1210
  Top Layer w15: D1.2 D1.2@-190,-1210
NetD2_2: D2.2 F1.2 Q1.1 Q1.2 Q1.3 R2.2
NetD8_1: D8.1 R15.1 | length 59.4
  Top Layer w15: D8.1 -966.39,-774.24 R15.1
NetD9_1: D9.1 R16.1 | length 58.8
  Top Layer w15: D9.1 -887.52,-850.93 R16.1
NetD10_1: D10.1 R17.1 | length 60.1
  Top Layer w15: D10.1 -811.96,-930.93 R17.1
NetD12_2: D12.2 J2.1 J2.2
NetD15_1: D15.1 R18.1 | length 61.4
  Top Layer w15: D15.1 -736.39,-1010.93 R18.1
NetD16_1: D16.1 R19.1 | length 61.1
  Top Layer w15: R19.1 983.66,782.64 D16.1
NetD17_1: D17.1 R20.1 | length 61.1
  Top Layer w15: R20.1 903.66,862.64 D17.1
NetD18_1: D18.1 R21.1 | length 61.1
  Top Layer w15: R21.1 823.66,942.64 D18.1
NetD19_1: D19.1 R22.1 | length 61.1
  Top Layer w15: R22.1 743.66,1022.64 D19.1
NetJ2_26: J2.26 Q4.1 | length 508.7
  Top Layer w15: Q4.1 342.6,497.4 446.3,393.7 J2.26
NetP3_1: P3.1 W1.5
NetP9_1: P9.1 W2.5
NetP15_1: P15.1 P15.2 U6.3
NetR5_1: R5.1 U1.2 | length 81.7
  Top Layer w10: U1.2 -220,-563.46 R5.1
PB_BYPASS: Q2.1 R7.2 U8.16 | length 148
  Top Layer w15: R7.2 -366.06,-1347.4 Q2.1
PB_SENSE: R4.2 U8.17
PBC_EN: D20.1 Q1.4 Q2.3 R2.1 | length 236.2
  Top Layer w15: Q1.4 -305,-1201.54 R2.1 R2.1@-296.42,-1210.12 ; Q2.3 R2.1@-296.42,-1210.12 ; D20.1 -293.07,-1213.46 R2.1@-296.42,-1210.12
SW0: C8.2 R33.1 S4.1 U8.15
SWBATT: C3.2 Q1.0 Q1.5 Q1.6 Q1.7 Q1.8 R1.1 R3.2 U1.3 U1.4 | length 169.2
  Top Layer w10: -300,-680 -300,-640 -257.4,-597.4 -257.4,-538.9 C3.2
USART1_RX: P9.3 P9.4 U7.4 U7.6
USART1_TX: J2.7
V_BAT: C2.2 J2.28 R3.1 R6.2 | length 143.9
  Top Layer w10: R3.1 R6.2 -398.03,-531.5 C2.2
V_BATT_SUPPLY: C9.2 C10.2 C11.2 C12.2 C13.1 C14.1 F3.1 P20.1 P22.1 P24.1 P26.1 R1.2 U1.5 U5.1 U6.1 | length 983.9
  Top Layer w25: P26.1@-1250,270 P26.1@-1220,270 ; P26.1@-1189.37,250 v1(-1160,250) ; P26.1@-1189.37,280 v1(-1160,280) ; P26.1@-1189.37,310 v1(-1160,310) -1150.63,310 C12.2 ; C9.2@-360,1110 -319.37,1150.63 v1(-319.37,1160) P20.1@-319.37,1189.37 ; v1(-289.37,1160) P20.1@-289.37,1189.37 ; v1(-259.37,1160) P20.1@-259.37,1189.37 ; P24.1@260,-1189.37 v1(260,-1160) ; P24.1@290,-1189.37 v1(290,-1160) ; P24.1@320,-1189.37 v1(320,-1160) 320,-1150.63 C11.2 ; C10.2@1119.37,-350 v1(1160,-309.37) P22.1@1189.37,-309.37 ; v1(1160,-279.37) P22.1@1189.37,-279.37 ; v1(1160,-249.37) P22.1@1189.37,-249.37 ; P22.1@1190.63,-290 P22.1
  Top Layer w50: U6.1 C14.1@-400.17,257.6 ; C13.1 194.16,-333 U5.1
  other v1: -140,-893.66 -110,-893.66 -80,-893.66
pads on no net: FID1.0 FID2.0 J2.0 J2.5 J2.6 J2.8 J2.11 J2.12 J2.13 J2.14 J2.15 J2.16 J2.19 J2.20 J2.21 J2.22 J2.23 J2.25 J2.30 P3. P4. P5. P6. P7. P8. P9. P10. P15. U2.1 U2.3 U2.5 U3.1 U3.3 U3.5 U7.1 U7.3 U7.5 U8.7 U8.10 U8.11 W1.2 W2.2

## Polygon pours and split planes (outlines as drawn)
NetD12_2 on Top Layer "0" (hatched 90Degree grid 25 track 10, remove dead copper, pour order 14): 860,-760 940,-760 960,-740 990,-710 990,-530 670,-530 670,-580 720,-630 810,-630 860,-680 860,-700
D5V on Top Layer "0" (hatched 90Degree grid 25 track 10, remove dead copper, pour order 12): 720,-680 640,-680 630,-690 630,-750 640,-760 720,-760
V_BATT_SUPPLY on Top Layer "0" (hatched 90Degree grid 25 track 10, remove dead copper, pour order 10): -140,-1050 -70,-1050 -70,-740 -100,-740 -160,-680 -190,-680 -190,-720 -170,-740 -150,-760 -150,-810 -150,-1040 -140,-1050 -150,-1050
SWBATT on Top Layer "0" (hatched 90Degree grid 25 track 10, remove dead copper, pour order 8): -500,-1060 -270,-1060 -270,-880 -280,-870 -290,-860 -290,-750 -250,-710 -250,-680 -410,-680 -480,-750 -490,-760 -490,-1050
NetD2_2 on Top Layer "0" (hatched 45Degree grid 25 track 10, remove dead copper, pour order 6): -650,-1240 -440,-1240 -420,-1240 -410,-1230 -350,-1230 -350,-1110 -500,-1110 -580,-1190 -650,-1190
BAT on Top Layer "0" (hatched 45Degree grid 25 track 10, remove dead copper, pour order 2): -600,-1300 -600,-1350 -570,-1380 -410,-1380 -410,-1290 -600,-1290
BAT on Bottom Layer "0" (hatched 45Degree grid 25 track 10, remove dead copper, pour order 4): -571.38,-1377.34 -648.72,-1300 -648.72,-1228.72 -450,-1030 -360,-1120 -360,-1240 -360,-1377.34
D3V3 on InternalPlane1 (split plane): 144.9,560 145.29,558.05 146.4,556.4 346.4,356.4 348.05,355.29 350,354.9 520,354.9 521.95,355.29 523.6,356.4 812.11,644.9 957.89,644.9 1022.79,580 457.89,15.1 182.11,15.1 115.1,82.11 115.1,420 114.71,421.95 113.6,423.6 -14.9,552.11 -14.9,904.9 144.9,904.9
D5V on InternalPlane1 (split plane): 1357.24,563.06 1357.24,-164.9 1140,-164.9 1138.05,-165.29 1136.4,-166.4 1086.4,-216.4 1085.29,-218.05 1084.9,-220 1084.9,-497.89 567.89,-1014.9 252.11,-1014.9 205.1,-967.89 205.1,-602.11 343.6,-463.6 344.71,-461.95 345.1,-460 345.1,-400 344.71,-398.05 343.6,-396.4 338.6,-391.4 336.95,-390.29 335.08,-389.92 334.71,-388.05 333.6,-386.4 273.6,-326.4 271.95,-325.29 270,-324.9 -84.9,-324.9 -84.9,17.89 -85.11,18.94 -84.9,20 -85.29,21.95 -86.4,23.6 -496.39,433.6 -496.4,433.6 -812.79,750 -477.89,1084.9 -230,1084.9 -228.05,1085.29 -226.4,1086.4 -176.4,1136.4 -175.29,1138.05 -174.9,1140 -174.9,1357.24 563.06,1357.24
V_BATT_SUPPLY on InternalPlane1 (split plane): -185.1,1142.11 -232.11,1095.1 -480,1095.1 -481.95,1094.71 -483.6,1093.6 -823.6,753.6 -824.71,751.95 -825.1,750 -824.71,748.05 -823.6,746.4 -503.6,426.4 -503.6,426.39 -95.1,17.89 -95.1,-330 -94.71,-331.95 -93.6,-333.6 -91.95,-334.71 -90,-335.1 267.89,-335.1 326.4,-393.6 328.05,-394.71 329.92,-395.08 330.29,-396.95 331.4,-398.6 334.9,-402.11 334.9,-457.89 196.4,-596.4 195.29,-598.05 194.9,-600 194.9,-970 195.29,-971.95 196.4,-973.6 246.4,-1023.6 248.05,-1024.71 250,-1025.1 570,-1025.1 571.95,-1024.71 573.6,-1023.6 575.1,-1022.11 1093.6,-503.6 1094.71,-501.95 1095.1,-500 1095.1,-222.11 1142.11,-175.1 1357.24,-175.1 1357.24,-563.06 563.06,-1357.24 -563.06,-1357.24 -1357.24,-563.06 -1357.24,563.06 -563.06,1357.24 -185.1,1357.24

## Keep-outs
Keep-Out Layer:
  the board outline again, w10

## Other copper
Bottom Layer:
  text "Batt GND" at -1140,-360 h30 r45
  text "Batt +" at -470,-1040 h30 r45
InternalPlane1 (plane layer: these items are gaps in the copper):
  lines w10: -510,440 -90,20 ; -500,430 -820,750 -480,1090 -230,1090 -180,1140 -180,1377.34 ; -90,17.89 -90,-330 270,-330 330,-390 ; 335,-395 340,-400 340,-460 200,-600 200,-970 250,-1020 570,-1020 710,-880 ; 571.49,-1018.51 1090,-500 1090,-220 1140,-170 1380,-170 ; -20,550 110,420 110,80 180,10 460,10 1030,580 960,650 810,650 520,360 350,360 150,560 150,910 -20,910 -20,550

## Silkscreen, mask and mechanical layers (free items; w line width, h text height)
Top Overlay:
  drawing of 19 lines, arcs and shapes, not listed
  text "GND" at -600,1260 h40 r270
  text "PWR" at -220,1260 h40 r270
  text "Function" at 460,1220 h50 r180
  text "P4" at 150,1150 h60 r180
  text "P5" at -539.08,1081.21 h60 r225
  text "PWR" at 870,1070 h50 r135
  text "LED" at 923.32,1014.44 h40 r135
  text "2" at 954.86,992.04 h60 r135
  text "LED" at 1003.32,934.44 h40 r135
  text "1" at 1029.11,917.79 h60 r135
  text "I2C" at -700,880 h60 r225
  text "LED" at 1077.57,860.19 h40 r135
  text "0" at 1059.89,828.37 h60 r315
  text "P15" at -814.28,816.01 h60 r225
  text "AdapterBoard" at -480,760 h40
  text "5" at 1160,730 h50
  text "Dec13" at -490,700 h50
  text "v0.0" at -330,700 h40
  text "3" at 1060,690 h50
  text "11" at 1200,640 h50
  text "5V" at -1010,580 h60 r225
  text "GND" at -1260,570 h40
  text "GPIO" at 1120,470 h60 r90
  text "camera" at -981.5,260 h40
  text "direction" at -1031.5,240 h40 r315
  text "PWR" at -1260,190 h40
  text "P3" at 1150,170.79 h60 r90
  text "P10" at -1150,150 h60 r270
  text "P6" at 1150,-150 h60 r90
  text "P9" at -1150,-200 h60 r270
  text "PWR" at 1180,-220 h40
  text "UART" at -1120,-470 h60 r270
  text "GND" at 1180,-600 h40
  text "11" at -1260,-660 h50
  text "3" at -1100,-710 h50
  text "5" at -1200,-750 h50
  text "0" at -1052.62,-825.64 h60 r135
  text "LED" at -1070.3,-857.46 h40 r315
  text "F3" at -20,-900 h40
  text "ON" at 680,-900 h60 r45
  text "1" at -1021.84,-915.06 h60 r315
  text "LED" at -996.06,-931.71 h40 r315
  text "2" at -947.59,-989.31 h60 r315
  text "LED" at -916.06,-1011.71 h40 r315
  text "P7" at 559.08,-1061.21 h60 r45
  text "PWR" at -862.73,-1067.27 h50 r315
  text "P8" at -130,-1150 h60
  text "GND" at 600,-1230 h40 r90
  text "PWR" at 220,-1260 h40 r90
  text "F1" at -570,-1310 h40 r90
Mechanical 1:
  lines w10: -2303.15,-790 -1968.5,-790 -1968.5,-455.35 -2303.15,-455.35
Mechanical 4:
  lines w5: -1020,-1020 590.55,590.55 ; -590.55,590.55 588.66,-588.66 ; 0,0 974.36,974.36